# Altium PCB HX711.PcbDoc
Units mm, origin at the board's own origin, x right, y up, seen from the top; angles counter-clockwise.
Board outline 41.15 x 28.96 mm, 2 copper layers (Top Layer, Bottom Layer); 11 components, 29 nets, 41 pads, 9 vias.
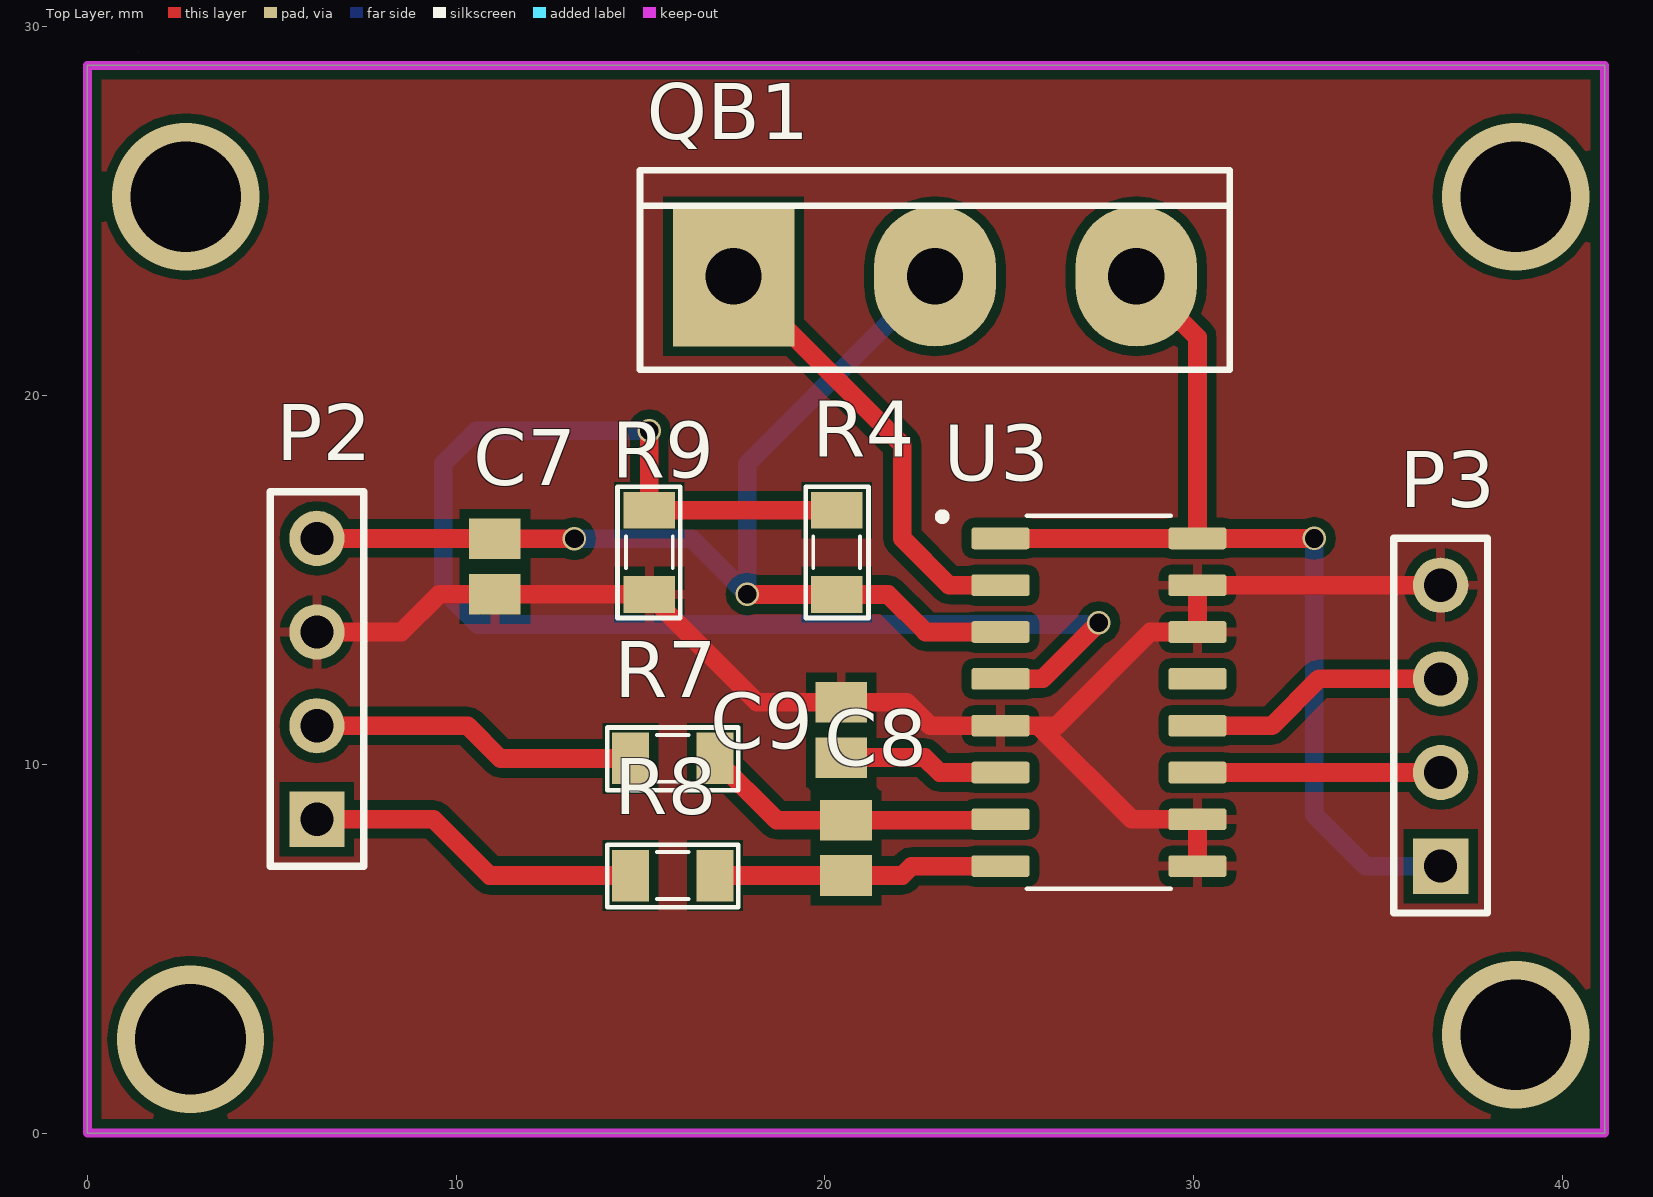
[diagram p0: Top Layer view]
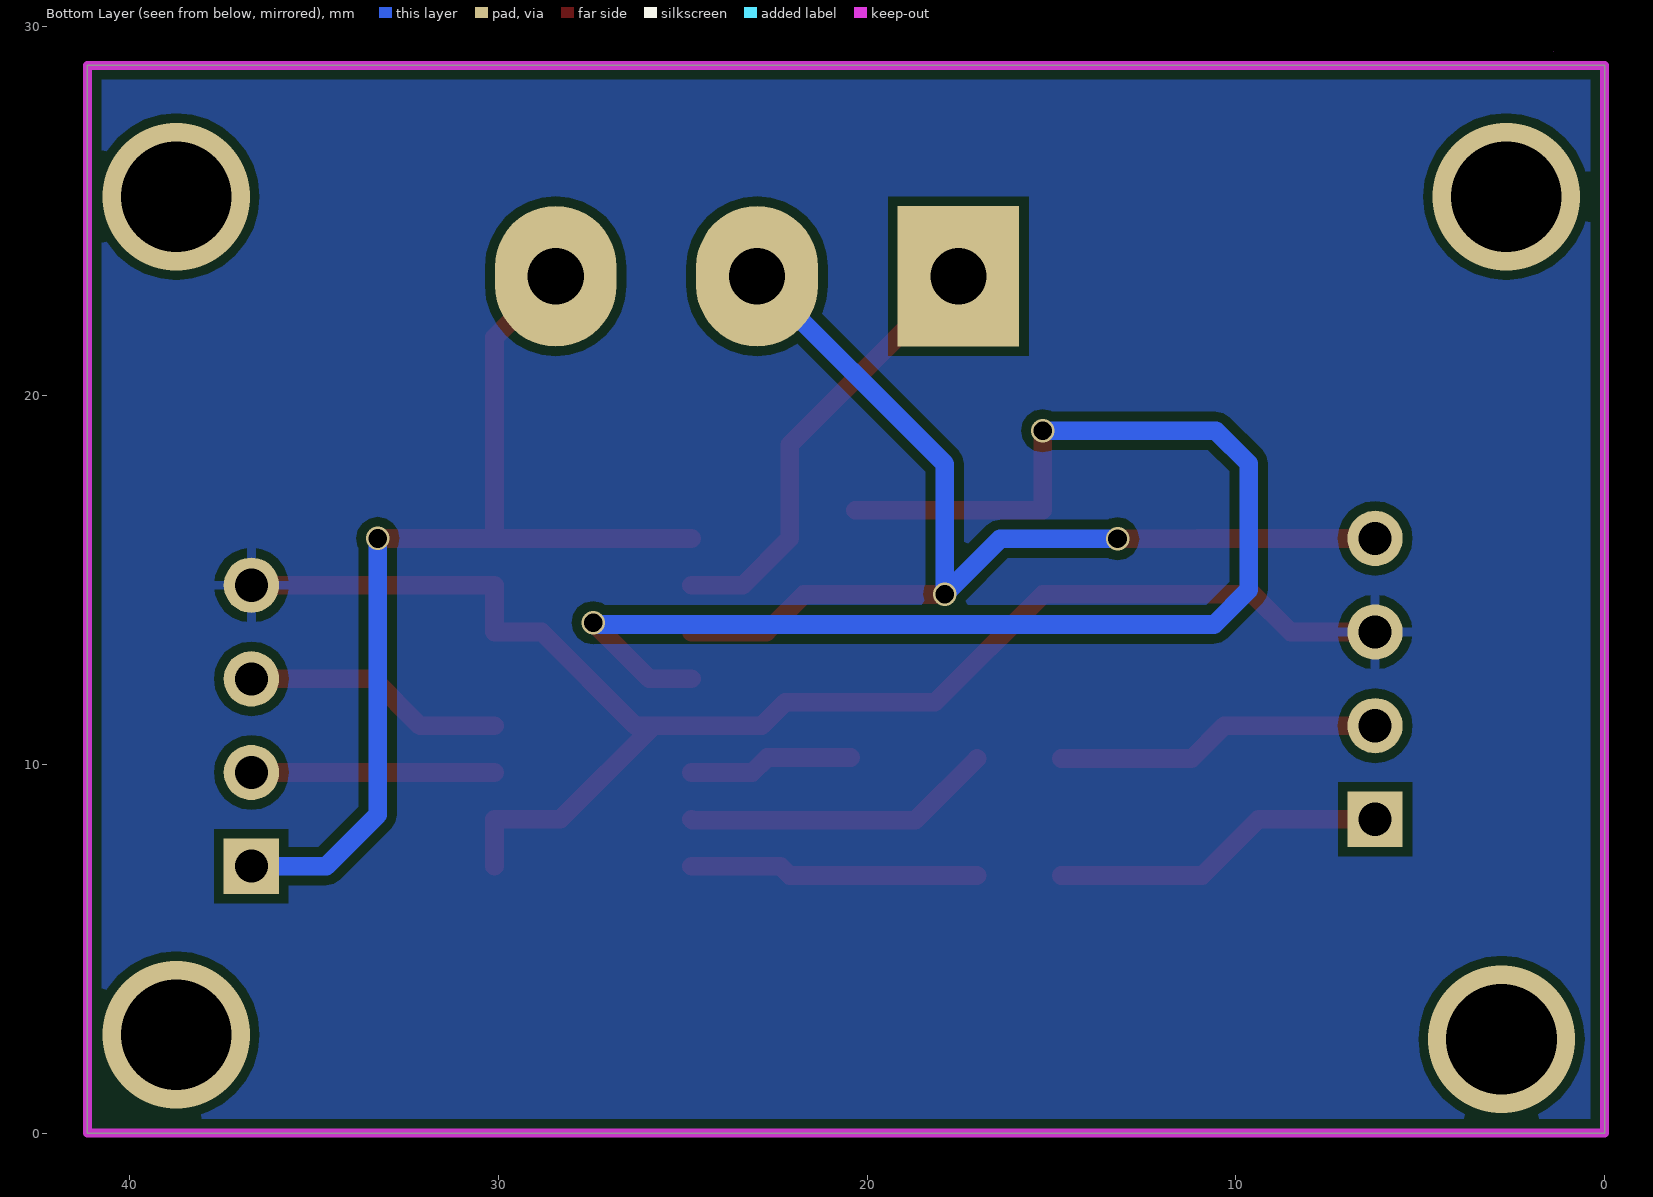
[diagram p1: Bottom Layer view, seen from below]
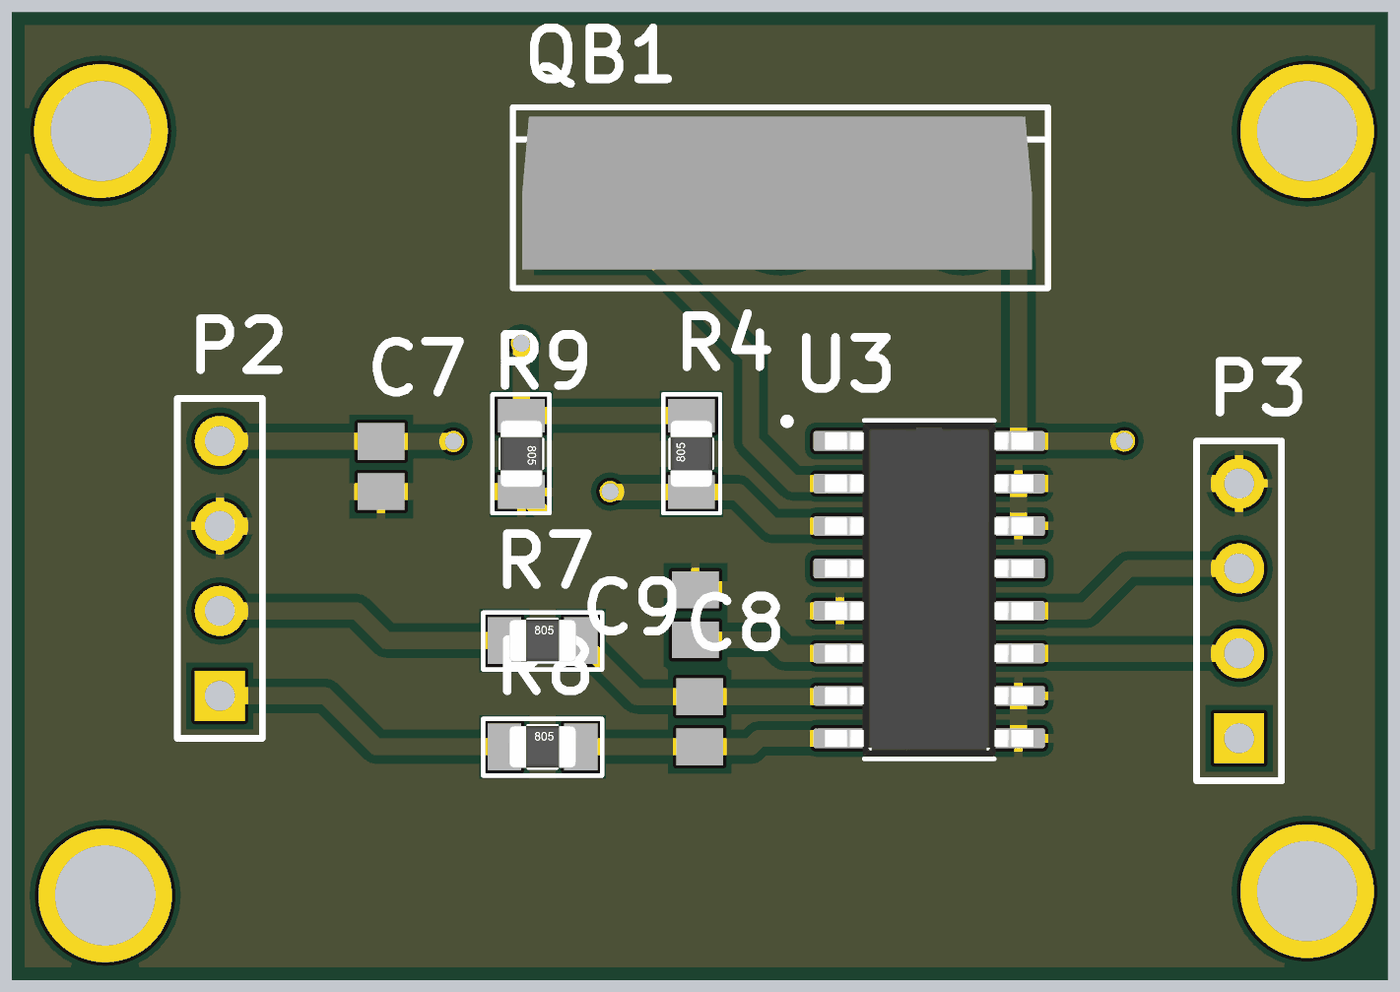
[diagram p2: 3D render of the assembled board from above, using the file's embedded part models]

## Layer stack, top to bottom
Top Solder: solder mask 0.0102, Solder Resist, Dk 3.5
Top Layer: signal copper 0.0356
Dielectric 1: dielectric 0.32, FR-4, Dk 4.8
Bottom Layer: signal copper 0.0356
Bottom Solder: solder mask 0.0102, Solder Resist, Dk 3.5

## Board outline
0,0 0,28.956 41.148,28.956 41.148,0

## Design rules (kind name [scope] priority, off if disabled: settings)
Clearance [All] p1: gap=0.254 ignorepadtopadclearanceinfootprint=FALSE except(0: Arc-Hole Track-Hole SMDPad-Hole THPad-Hole Via-Hole Fill-Hole Poly-Hole Region-Hole Text-Hole)
PolygonConnect [All] p1: connectstyle=Relief reliefconductorwidth=0.254 reliefentries=4 polygonreliefangle="90 Angle" airgapwidth=0.254
RoutingVias [All] p1: holewidth=0.508 width=0.635 viastyle="Through Hole" minholewidth=0.508 minwidth=0.635 maxholewidth=1.27 maxwidth=1.397
SolderMaskExpansion [All] p1: expansion=0.102
Width [All] p1: maxlimit=1.27 minlimit=0.508 preferedwidth=0.762
30 further rules are at their usual default settings.

## Components (designator, comment, footprint, x,y, rotation, side; value= is the part's Value field where it differs from the comment)
C7 "10uF" C0805 11.049,15.367 r90 top value=33p
C8 "Capacitor Ceramic" C0805 20.574,7.735 r90 top value=33p
C9 "0.1uF" C0805 20.447,10.934 r90 top value=33p
P2 "Header 4" HDR1X4 6.223,8.509 r90 top
P3 "Header 4" HDR1X4 36.703,7.239 r90 top
QB1 "B688" QTO-247 17.526,23.241 r0 top
R4 "1k" RES-SMD-0805 20.32,15.748 r90 top
R7 "3M" RES-SMD-0805 15.875,10.16 r0 top
R8 "3M" RES-SMD-0805 15.875,6.985 r0 top
R9 "1k" RES-SMD-0805 15.24,15.748 r270 top
U3 "HX711" SOP127P600X180-16N 27.435,11.684 r0 top

## Footprints (in the part's own frame and the unit in brackets; to place one, negate y for a bottom-side part, rotate by r counter-clockwise, add the part's x,y. Pads: shape width x height; smd on the part's side, far side on the other; paste and mask are expansions set on the pad)
C0805 [mm] "Chip Capacitor, Body 2.0x1.3mm, IPC High Density"
  rect 1.1x1.4 smd: 1(-0.75,0) 2(0.75,0)
  body extent -1.1,-0.72 1.1,0.72, height 1.4
HDR1X4 [mm] "Connector; Header; 4 Position"
  rect 1.5x1.5 hole 0.9: 1(0,0)
  round 1.5 hole 0.9: 2(2.54,0) 3(5.08,0) 4(7.62,0)
  silkscreen extent -1.27,-1.27 8.89,1.27
QTO-247 [mil] "TO-247"
  rect 130x150 hole 60: 1(0,0)
  oval 130x150 hole 60: 2(215,0) 3(430,0)
  silkscreen extent -100,-100 530,113, body extent -89,-78 511,102, height 941
RES-SMD-0805 [mil]
  rect 39.37x55 smd: 1(-45,0) 2(45,0)
  silkscreen extent -70,-34 70,33, body extent -39,-25 39,25, height 31
SOP127P600X180-16N [mm]
  rrect25% 1.58x0.59 smd: 1(-2.67,4.445) 2(-2.67,3.175) 3(-2.67,1.905) 4(-2.67,0.635) 5(-2.67,-0.635) 6(-2.67,-1.905) 7(-2.67,-3.175) 8(-2.67,-4.445) 9(2.67,-4.445) 10(2.67,-3.175) 11(2.67,-1.905) 12(2.67,-0.635) 13(2.67,0.635) 14(2.67,1.905) 15(2.67,3.175) 16(2.67,4.445)
  silkscreen extent -4.35,-5.06 1.95,5.13, body extent -3.12,-4.99 3.12,4.99, height 1.58

## Part data
C7 C8 C9: library part CapSMD, "Capacitor", LatestRevisionDate=17-Jul-2002, LatestRevisionNote="Re-released for DXP Platform.", PackageReference=RAD-0.3, Published=8-Jun-2000, Publisher="Altium Limited"
P2 P3: "Header, 4-Pin", LatestRevisionDate=17-Jul-2002, LatestRevisionNote="Re-released for DXP Platform.", Publisher="Altium Limited"
QB1: "Transistor Power Supply"
R4 R7 R8 R9: library part Res-SMD, "Resistor", Manufacturer="Generic Components", Class=Passive, Published=08/06/2000, Publisher="Altium Hobart Technology Centre"
U3: Package=None, Availability=Unavailable, MP=HX711, Price=None

## Via types
v1: diameter 0.635, hole 0.508, Top Layer to Bottom Layer, 5 vias
v2: diameter 4, hole 3, Top Layer to Bottom Layer, 4 vias

## Nets (pads, with @x,y where several pads share a name; then routed paths per layer and width w, separated by ;. In a path a pad name is that pad's centre, name@x,y a point inside that pad or via, vN(x,y) a via of type N, cw(c..) or ccw(c..) an arc to the next point about the centre after c; other vN are vias at no path point)
3.3V: P3.1 QB1.3 U3.1 U3.16 | length 27.8
  Top Layer w0.508: U3.1 U3.16 ; QB1.3 30.105,21.584 U3.16 ; v1(33.274,16.129) U3.16
  Bottom Layer w0.508: v1(33.274,16.129) 33.274,8.636 34.671,7.239 P3.1
5V: 
AVDD: C7.2 P2.4 QB1.2 R4.1 U3.3 | length 30.3
  Top Layer w0.508: P2.4 11.037,16.129 C7.2 v1(13.208,16.117) ; v1(17.895,14.617) 17.907,14.605 R4.1 21.717,14.605 22.733,13.589 U3.3
  Bottom Layer w0.508: v1(13.208,16.117) 16.395,16.117 v1(17.895,14.617) 17.895,18.149 QB1.2
BASE: QB1.1 U3.2 | length 12.2
  Top Layer w0.508: QB1.1 22.098,18.669 22.098,16.129 23.368,14.859 U3.2
CS: 
DOUT: P3.3 U3.12 | length 7.1
  Top Layer w0.508: U3.12 32.131,11.049 33.401,12.319 P3.3
GND: C7.1 C9.2 P2.3 P3.4 R9.2 U3.5 U3.9 U3.10 U3.14 U3.15 | length 41.4
  Top Layer w0.508: P2.3 8.509,13.589 9.537,14.617 C7.1 15.228,14.617 R9.2 18.161,11.684 C9.2 22.225,11.684 22.86,11.049 U3.5 25.781,11.049 ; U3.9 U3.10 28.321,8.509 25.781,11.049 ; P3.4 U3.15 U3.14 28.829,13.589 26.289,11.049 25.781,11.049
INA+: C8.1 R8.2 U3.8 | length 7.9
  Top Layer w0.508: R8.2 C8.1 22.098,6.985 22.352,7.239 U3.8
INA-: C8.2 R7.2 U3.7 | length 8.5
  Top Layer w0.508: R7.2 18.693,8.485 C8.2 24.741,8.485 U3.7
MISO: 
MOSI: 
NetC1_1: 
NetC1_2: 
NetC2_2: 
NetC4_1: 
NetC4_2: 
NetLED1_1: 
NetLED1_2: 
NetLED2_1: 
NetLED2_2: 
NetLS1_N: 
NetP1_3: 
NetP1_4: 
NetP2_1: P2.1 R8.1 | length 9.1
  Top Layer w0.508: P2.1 9.386,8.509 10.91,6.985 R8.1
NetP2_2: P2.2 R7.1 | length 8.9
  Top Layer w0.508: P2.2 10.311,11.049 11.2,10.16 R7.1
PD_SCK: P3.2 U3.11 | length 6.6
  Top Layer w0.508: U3.11 P3.2
SCK: 
VBG: C9.1 U3.6 | length 4.5
  Top Layer w0.508: C9.1 22.709,10.184 23.114,9.779 U3.6
VFB: R4.2 R9.1 U3.4 | length 38.1
  Top Layer w0.508: v1(15.24,19.05) R9.1 R4.2 ; U3.4 25.908,12.319 v1(27.432,13.843)
  Bottom Layer w0.508: v1(15.24,19.05) 10.541,19.05 9.652,18.161 9.652,14.732 10.592,13.792 27.381,13.792 v1(27.432,13.843)
pads on no net: U3.13
copper on no net:
  other v2: 2.794,2.54 38.735,2.667 2.667,25.4 38.735,25.4

## Polygon pours and split planes (outlines as drawn)
GND on Bottom Layer (solid, pour order 12): 0,28.956 41.148,28.956 41.148,0 0,0
GND on Bottom Layer (solid, pour order 4): 6.939,31.623
GND on Top Layer (solid, pour order 14): 0,28.956 0,0 41.148,0 40.894,0.254 40.894,28.956
GND on Top Layer (solid, pour order 10): 13.208,4.572
GND on Top Layer (solid, pour order 8): 10.033,1.905
GND on Top Layer (solid, pour order 6): 0,28.956

## Keep-outs
Keep-Out Layer:
  region: 1.397,29.337
  lines w0.254: 0,0 0,28.956 2.032,28.956 41.148,28.956 41.148,0 0.508,0 0,0